# Altium PCB TPS54531_V2.PcbDoc
Units mil, origin at the board's own origin, x right, y up, seen from the top; angles counter-clockwise.
Board outline 1035 x 775 mil, 2 copper layers (Top Layer, Bottom Layer); 21 components, 10 nets, 49 pads, 25 vias.
Unrouted connection lines stored in the file: 30.
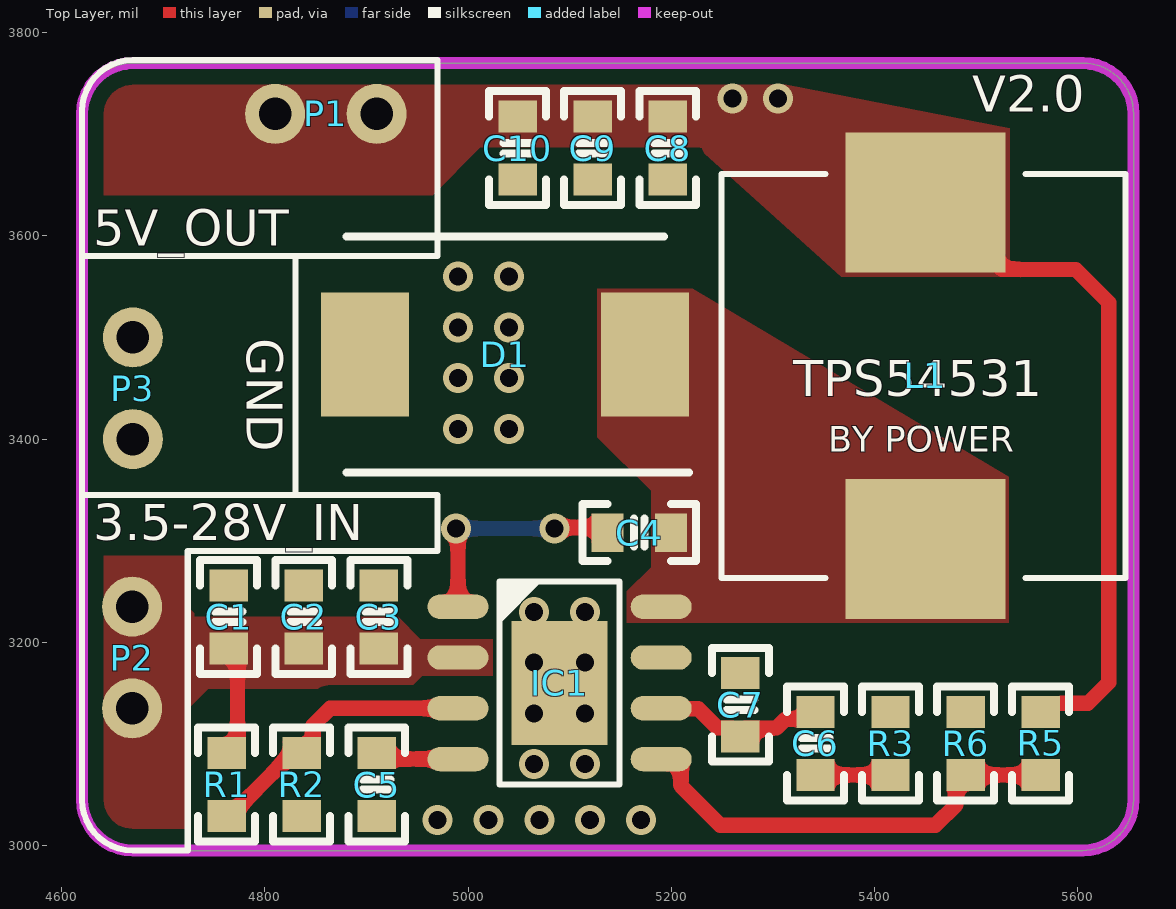
[diagram p0: Top Layer view]
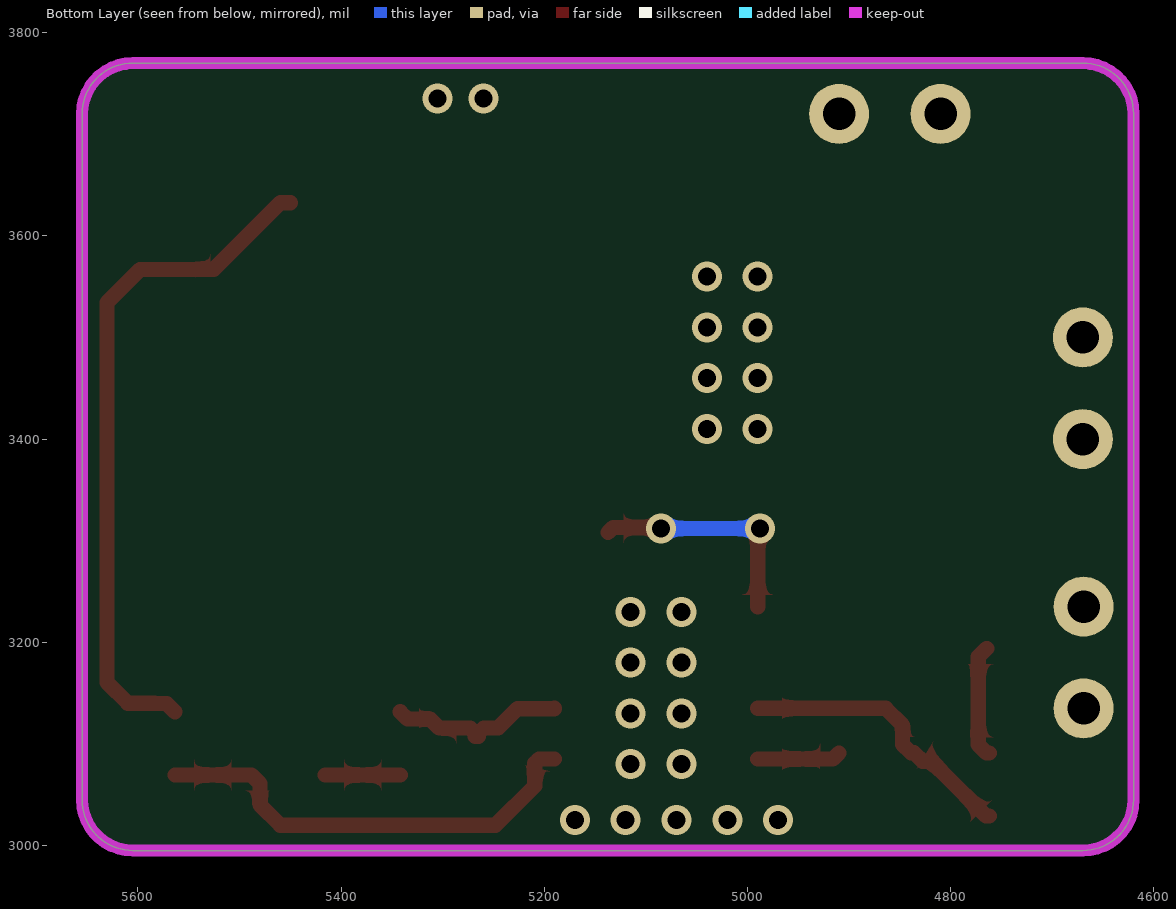
[diagram p1: Bottom Layer view, seen from below]
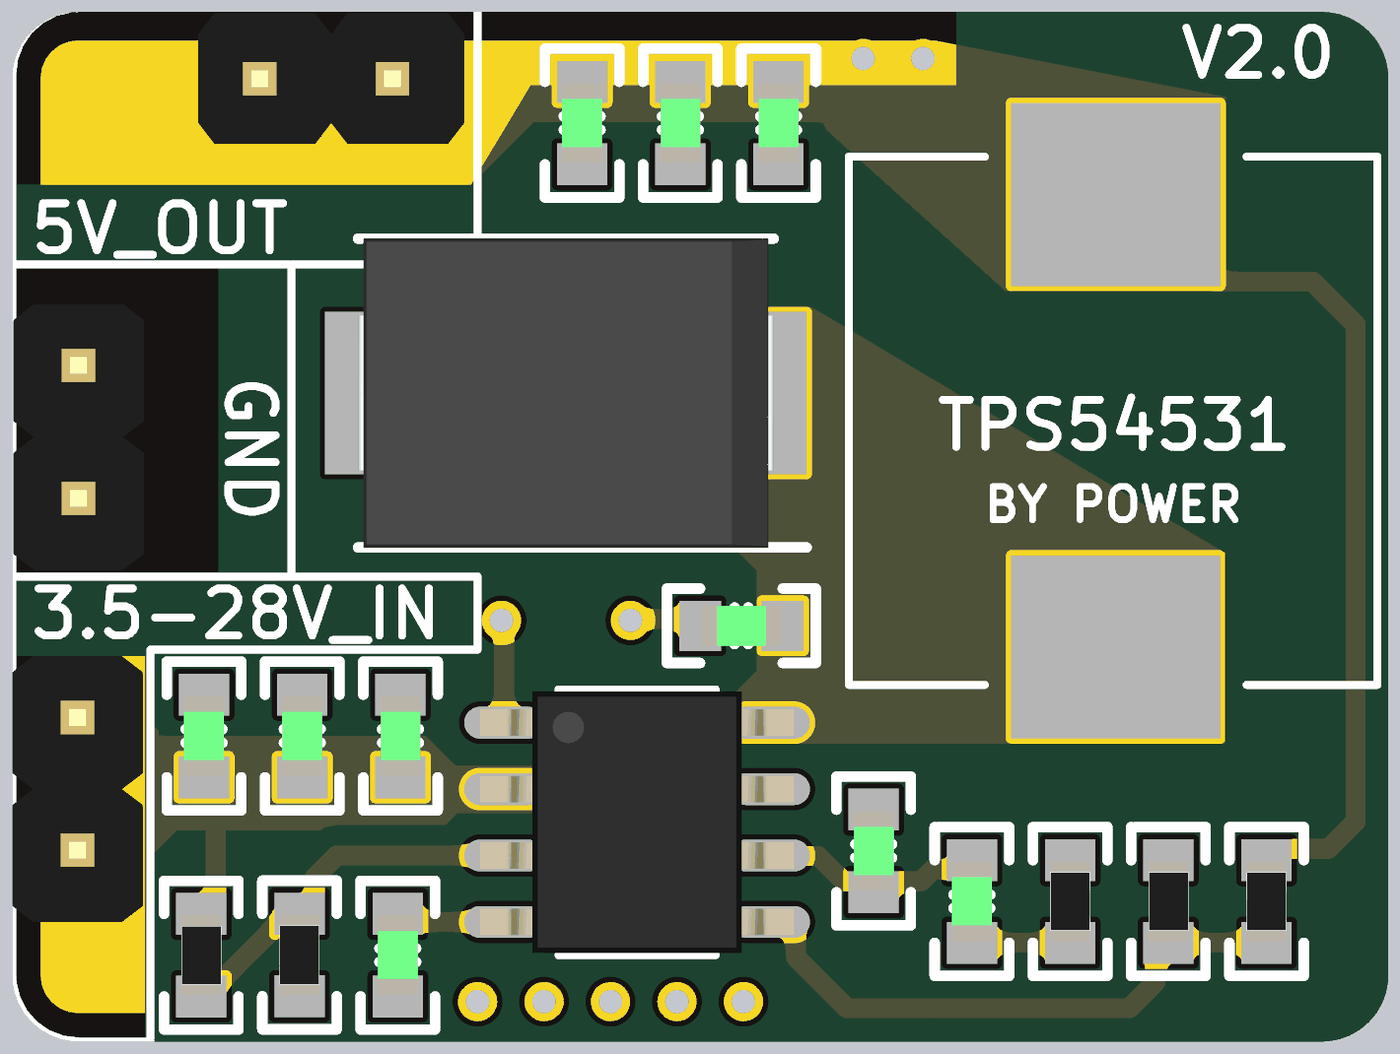
[diagram p2: 3D render of the assembled board from above, using the file's embedded part models]

## Layer stack, top to bottom
Top Solder: solder mask 0.4, Solder Resist, Dk 3.5
Top Layer: signal copper 1.4
Dielectric 1: dielectric 12.6, FR-4, Dk 4.8
Bottom Layer: signal copper 1.4
Bottom Solder: solder mask 0.4, Solder Resist, Dk 3.5

## Board outline
4620,3045 ccw(c4670,3045) 4670,2995 4780,2995 5605,2995 ccw(c5605,3045) 5655,3045 5655,3720 ccw(c5605,3720) 5605,3770 4670,3770 ccw(c4670,3720) 4620,3720

## Design rules (kind name [scope] priority, off if disabled: settings)
Clearance [All] p1: gap=10 ignorepadtopadclearanceinfootprint=FALSE except(0: Arc-Hole Track-Hole SMDPad-Hole THPad-Hole Via-Hole Fill-Hole Poly-Hole Region-Hole Text-Hole; 15: Arc-Fill Arc-Poly Arc-Region Track-Fill Track-Poly Track-Region SMDPad-Fill SMDPad-Poly SMDPad-Region THPad-Fill THPad-Poly THPad-Region Via-Fill Via-Poly Via-Region Fill-Fill Fill-Poly Fill-Region Poly-Poly Poly-Region Region-Region)
PlaneConnect [All] p1: planeconnectstyle=Direct reliefexpansion=20 reliefentries=4 reliefconductorwidth=10 reliefairgap=10
PolygonConnect [All] p1: connectstyle=Direct reliefconductorwidth=10 reliefentries=4 polygonreliefangle="90 Angle" airgapwidth=10
RoutingVias [All] p1: holewidth=17.72 width=29.53 viastyle="Through Hole" minholewidth=17.72 minwidth=29.53 maxholewidth=17.72 maxwidth=29.53
SolderMaskExpansion [All] p1: expansion=4 istentingtop=FALSE
Width [All] p1: maxlimit=100 minlimit=10 preferedwidth=15
29 further rules are at their usual default settings.

## Components (designator, comment, footprint, x,y, rotation, side; value= is the part's Value field where it differs from the comment)
C1 "4.7uF" CAP-0603 4764.28,3225 r270 top
C2 "4.7uF" CAP-0603 4838.17,3225 r270 top
C3 "100nF" CAP-0603 4912.05,3225 r270 top
C4 "100nF" CAP-0603 5168.44,3307.95 r0 top
C5 "10nF" CAP-0603 4910,3060 r90 top
C6 "2200pF" CAP-0603 5341.83,3100.42 r90 top
C7 "22pF" CAP-0603 5267.95,3138.42 r270 top
C8 "47uF" CAP-0603 5196.44,3686.38 r90 top
C9 "47uF" CAP-0603 5122.55,3686.38 r90 top
C10 "100nF" CAP-0603 5048.67,3686.38 r90 top
D1 "SS54" DO-214AB 5036.45,3483.16 r180 top
IC1 "TPS54531DDA" SOIC_8_PAD 5090,3160 r270 top
L1 "4.7uH 5A" L-10040 5450,3462.31 r90 top
P1 "HDR1x2_2.54" HDR1X2_2.54_180 4810,3720 r90 top
P2 "HDR1x2_2.54" HDR1X2_2.54_180 4669.28,3235 r0 top
P3 "HDR1x2_2.54" HDR1X2_2.54_180 4670,3500 r0 top
R1 "665k" R-0603 4762.23,3060 r90 top
R2 "130k" R-0603 4836.12,3060.12 r90 top
R3 "37.4k" R-0603 5415.72,3100.42 r270 top
R5 "10.2k" R-0603 5563.48,3100.42 r90 top
R6 "1.96k" R-0603 5489.6,3100.42 r270 top

## Footprints (in the part's own frame and the unit in brackets; to place one, negate y for a bottom-side part, rotate by r counter-clockwise, add the part's x,y. Pads: shape width x height; smd on the part's side, far side on the other; paste and mask are expansions set on the pad)
CAP-0603 [mm]
  rect 0.8x0.96 smd: 1(-0.79,0) 2(0.79,0)
  silkscreen extent -1.42,-0.71 1.42,0.71, body extent -0.76,-0.39 0.76,0.39, height 0.9
DO-214AB [mm]
  rect 2.2x3.1 smd: 1(3.5,0) 2(-3.5,0)
  silkscreen extent -4.6,-2.95 3.97,2.95, body extent -3.97,-2.95 3.97,2.95, height 2.5
HDR1X2_2.54_180 [mm]
  round 1.5 hole 0.813: 1(0,0) 2(0,-2.54)
  body extent -1.25,-3.81 1.25,1.27, height 8.2
L-10040 [mm] "10.1*11.6*4.0MM(长*宽*高)"
  rect 3.5x4 smd: 1(-4.326,0) 2(4.326,0)
  silkscreen extent -5.05,-5 5.05,5.1, body extent -5,-5 5,5.08, height 4
R-0603 [mm]
  rect 0.8x0.96 smd: 1(-0.79,0) 2(0.79,0)
  silkscreen extent -1.42,-0.71 1.42,0.71, body extent -0.76,-0.38 0.76,0.38, height 0.41
SOIC_8_PAD [mil]
  oval 24x60 smd: 1(-75,-100) 2(-25,-100) 3(25,-100) 4(75,-100) 5(75,100) 6(25,100) 7(-25,100) 8(-75,100)
  rect 122.05x94.49 smd: 9(0,0)
  silkscreen extent -100,-59 100,59, body extent -98,-118 98,118, height 71

## Part data
C1 C2 C3 C4 C5 C6 C7 C8 C9 C10: library part CAP, "贴片电容", Package=0402, SuppliersPartNumber=C52923, ComponentLink1Description=供应商链接, ComponentLink1URL=http://www.szlcsc.com/product/details_53938.html, Supplier=LC
D1: library part DIODE, "肖特基二极管", Package=SMA(DO-214AC), SuppliersPartNumber=C22452, ComponentLink1Description=供应商链接, ComponentLink1URL=http://www.szlcsc.com/product/details_23178.html, Supplier=LC
IC1: "集成稳压芯片", Manufacturer_Name="Texas Instruments", Mouser Part Number=595-TPS54531DDA, Arrow Part Number=TPS54531DDA, Arrow Price/Stock=https://www.arrow.com/en/products/tps54531dda/texas-instruments, Datasheet Link=http://www.ti.com/lit/gpn/tps54531, Height=1.7mm, Manufacturer_Part_Number=TPS54531DDA, Mouser Price/Stock=https://www.mouser.co.uk/ProductDetail/Texas-Instruments/TPS54531DDA?qs=jA5Ki6243omoJVKISZs%2FBg%3D%3D
L1: library part INDUCTOR, "电感", Package=0402, SuppliersPartNumber=C32041, ComponentLink1Description=供应商链接, ComponentLink1URL=http://www.szlcsc.com/product/details_33003.html, Supplier=LC
P1 P2 P3: "Header"
R1 R2 R3 R5 R6: library part RES, "贴片电阻", Package=0805, SuppliersPartNumber=C17798, Supplier=LC

## Via types
v1: diameter 29.53, hole 17.72, Top Layer to Bottom Layer, 25 vias

## Nets (pads, with @x,y where several pads share a name; then routed paths per layer and width w, separated by ;. In a path a pad name is that pad's centre, name@x,y a point inside that pad or via, vN(x,y) a via of type N, cw(c..) or ccw(c..) an arc to the next point about the centre after c; other vN are vias at no path point)
5V: C8.2 C9.2 C10.2 L1.2 P1.1 P1.2 R5.2 | length 674.2
  Top Layer w15: L1.2 5459.84,3632.63 5525.47,3567 5598,3567 5630.5,3534.5 5630.5,3160.5 5610,3140 5583.67,3140 5583.43,3139.77 5571.73,3139.77 R5.2
  other v1: 5260,3735 5305,3735
GND: C1.1 C2.1 C3.1 C5.1 C7.1 C8.1 C9.1 C10.1 D1.1 IC1.7 IC1.9 P3.1 P3.2 R2.1 R3.1 R6.1
  other v1: 4970,3025 5020,3025 5070,3025 5120,3025 5170,3025 5065,3080 5115,3080 5065,3130 5115,3130 5065,3180 5115,3180 5065,3230 5115,3230 4990,3410 5040,3410 4990,3460 5040,3460 4990,3510 5040,3510 4990,3560 5040,3560
NetC4_1: C4.1 IC1.1 | length 229.7
  Top Layer w15: v1(4988,3312) 4990,3310 IC1.1 ; v1(5085,3312) 5086,3313 5132.28,3313 C4.1
  Bottom Layer w15: v1(4988,3312) v1(5085,3312)
NetC4_2: C4.2 D1.2 IC1.8 L1.1
NetC5_2: C5.2 IC1.4 | length 82.5
  Top Layer w15: C5.2 4916.1,3085 IC1.4
NetC6_1: C6.1 R3.2 | length 73.9
  Top Layer w15: C6.1 R3.2
NetC6_2: C6.2 C7.2 IC1.6 | length 176.5
  Top Layer w15: IC1.6 5190.4,3134.6 5226.4,3134.6 5245.44,3115.56 5259.7,3115.56 C7.2 ; C7.2@5264.8,3107.31 5273.05,3115.56 5303.56,3115.56 5312.44,3124.44 5334.75,3124.44 C6.2
NetIC1_3: IC1.3 R1.1 R2.2 | length 282.9
  Top Layer w15: R1.1 4765.38,3028.9 4819.45,3082.97 4827.87,3082.97 R2.2 4839.27,3091.22 4847.51,3099.47 4847.51,3118.51 4864,3135 IC1.3
NetIC1_5: IC1.5 R5.1 R6.2 | length 446.3
  Top Layer w15: IC1.5 5205.34,3085 5209.5,3080.84 5209.5,3058.5 5248,3020 5460,3020 5480,3040 5480,3061.06 5488.25,3069.31 R6.2 R5.1
VM: C1.2 C2.2 C3.2 IC1.2 P2.1 P2.2 R1.2 | length 112.6
  Top Layer w15: R1.2 4764.75,3091.1 4773,3099.35 4773,3185.65 4764.75,3193.9 C1.2

## Polygon pours and split planes (outlines as drawn)
GND on Top Layer "NONET_L01_P-001" (solid, remove dead copper, pour order 5): 5075,5695 5075,4090 7380,4090 7380,5765
VM on Top Layer "NONET_L01_P-001" (solid, pour order 1): 4621,3285 4621,2995 4721,2995 4721,3131 4744,3154 4942,3154 4955,3167 5024,3167 5024,3203 4953,3203 4931,3225 4734,3225 4721,3238 4721,3285
5V on Top Layer "NONET_L01_P-001" (solid, pour order 4): 5012,3687 4965,3640 4620,3640 4620,3770 5203.24,3770 5533,3706 5533,3560 5367,3560 5226,3687
NetC4_2 on Top Layer "NONET_L01_P-001" (solid, pour order 0): 5156,3219 5532,3219 5532,3363 5221,3548 5127,3548 5127,3402 5180,3349 5180,3274 5156,3250
5V on Top Solder "NONET_L01_P-001" (solid): 5330,3770 5330,3715 5010,3715 4965,3640 4619,3640 4619,3720 cw(c4669,3720) 4669,3770
GND on Top Solder "NONET_L01_P-001" (solid): 4620,3345 4775,3345 4775,3580 4620,3580
VM on Top Solder "NONET_L01_P-001" (solid): 4720,3285 4720,2995 4669,2995 cw(c4669,3044) 4620,3044 4620,3285
5V on Bottom Solder "NONET_L01_P-001" (solid): 4965,3640 4619,3640 4619,3720 cw(c4669,3720) 4669,3770 4965,3770
GND on Bottom Solder "NONET_L01_P-001" (solid): 4620,3345 4775,3345 4775,3580 4620,3580
no net on Bottom Solder "NONET_L01_P-001" (solid): 4719.91,3285 4719.91,2995 4668.91,2995 cw(c4668.91,3044) 4619.91,3044 4619.91,3285
GND on Bottom Layer "NONET_L01_P-001" (solid, remove dead copper, pour order 6): 5064.96,5711.41 5064.96,4106.41 7369.96,4106.41 7369.96,5781.41

## Keep-outs
Keep-Out Layer:
  lines w12: 4620,3045 ccw(c4670,3045) 4670,2995 4780,2995 5605,2995 ccw(c5605,3045) 5655,3045 5655,3700 5655,3720 ccw(c5605,3720) 5605,3770 4670,3770 ccw(c4670,3720) 4620,3720 4620,3670 4620,3045

## Silkscreen, mask and mechanical layers (free items; w line width, h text height)
Top Overlay:
  lines w6: 4845,3345 4830,3345 4830,3580 ; 4620,3345 4620,3580 ; 4620,3345 4970,3345 4970,3290 4724,3290 4724,2995 4670,2995 cw(c4670,3045) 4620,3045 4620,3345 ; 4620,3580 4620,3723 cw(c4670,3723) 4670,3773 4970,3773 4970,3580 4830,3580 ; 4620,3580 4830,3580
  text "V2.0" at 5495.91,3722.29 h35.43
  text "5V_OUT" at 4630.91,3590.24 h35.43
  text "GND" at 4782.29,3499.09 h35.43 r270
  text "TPS54531" at 5320.12,3442.29 h35.43
  text "BY POWER" at 5354.2,3387.5 h25
  text "3.5-28V_IN" at 4630.91,3300.24 h35.43
Mechanical 1:
  lines w12: 4620,3045 ccw(c4670,3045) 4670,2995 4780,2995 5605,2995 ccw(c5605,3045) 5655,3045 5655,3700 5655,3720 ccw(c5605,3720) 5605,3770 4670,3770 ccw(c4670,3720) 4620,3720 4620,3670 4620,3045